# EAGLE board 04A-020-A1-01 (EAGLE 9.6.2)
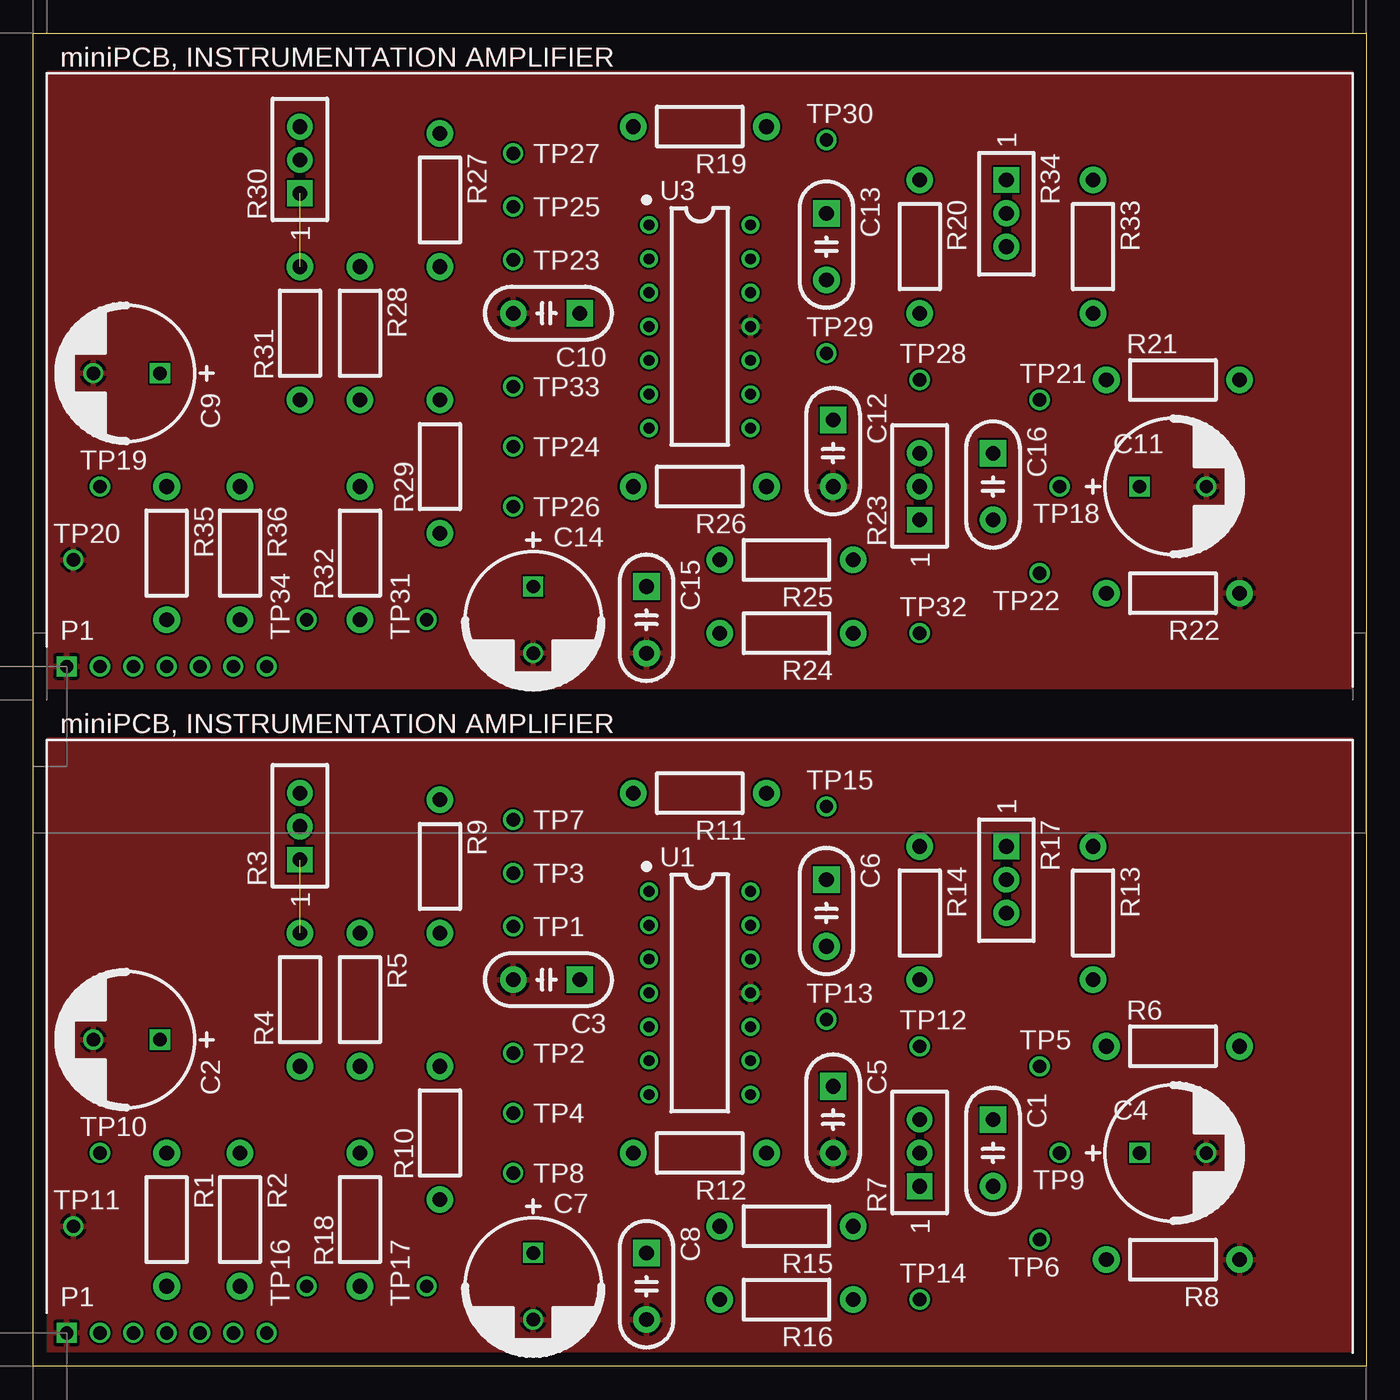
[diagram p0: board, top side]
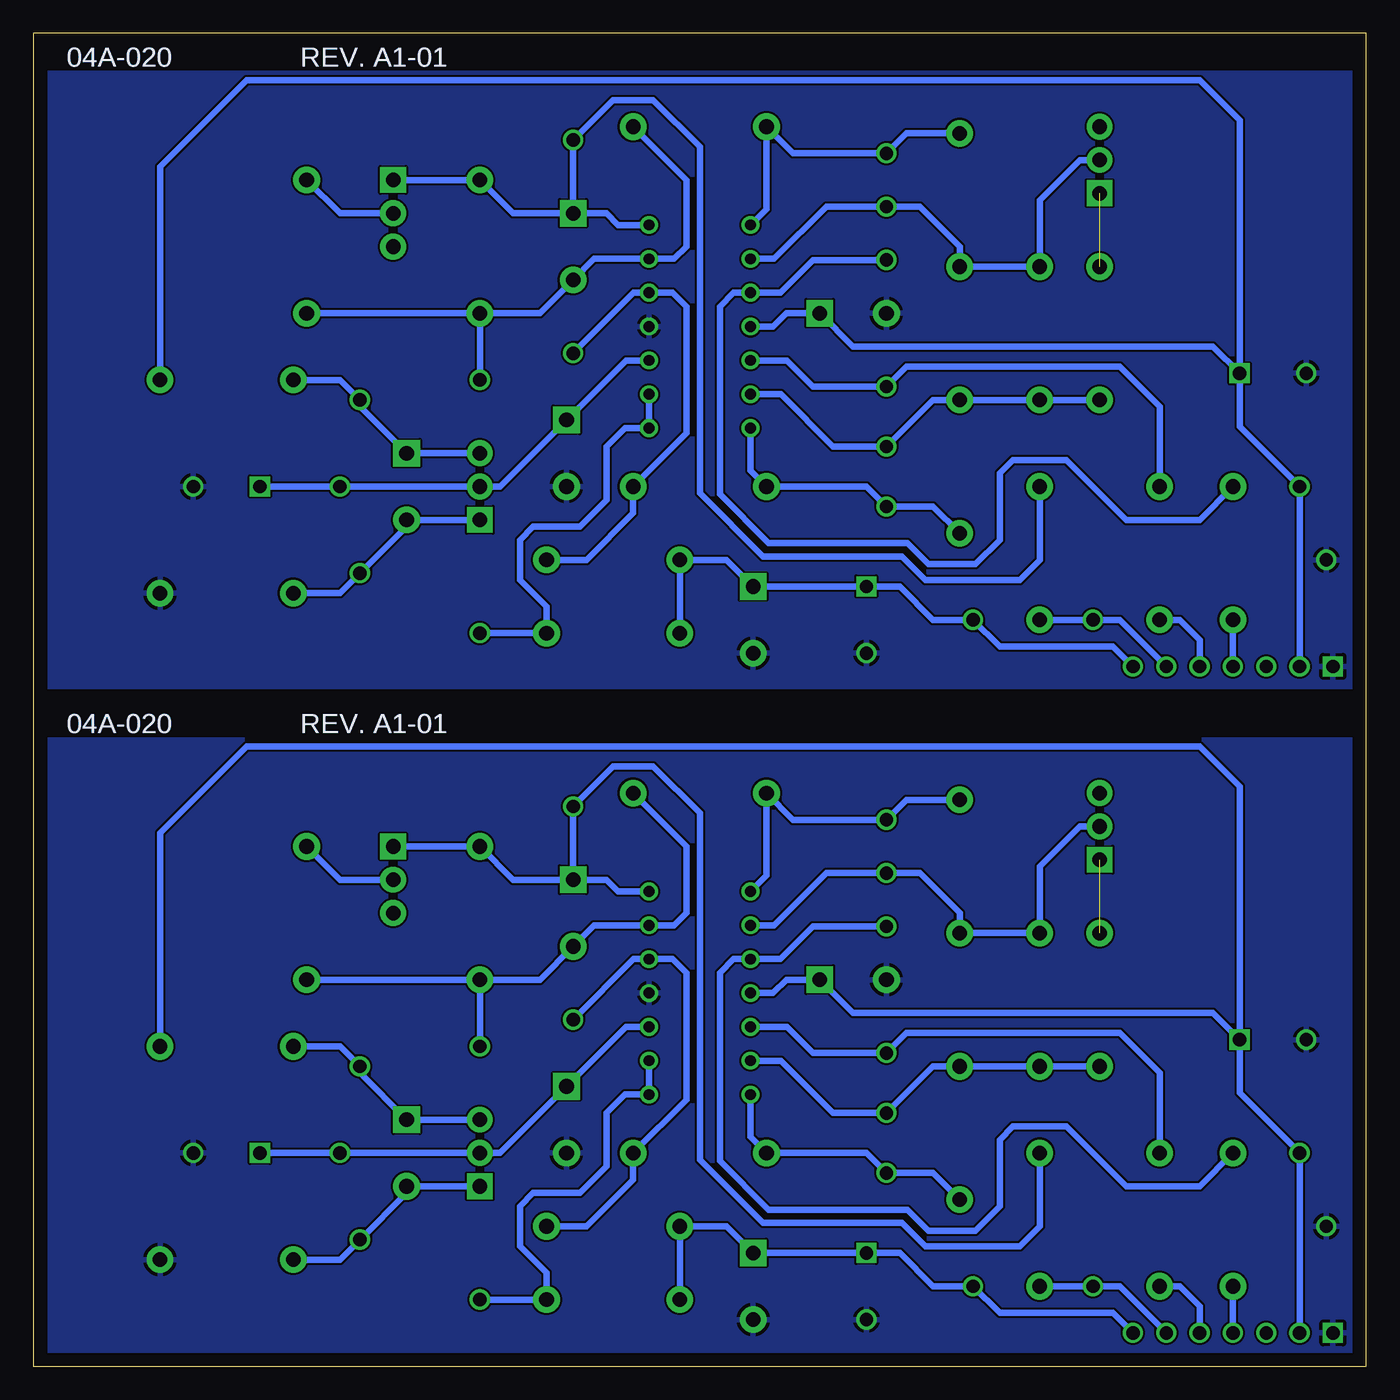
[diagram p1: board, bottom side, seen from below]

Size 100 x 100 mm. Coordinates in mm from the lower left corner, seen from the top.
Outline: 0,0 0,100 100,100 100,0 0,0
Copper layers (1*16): Top 0.035mm / dielectric 0.15mm / Bottom 0.035mm
Design rules "default": minimum track width 6mil, minimum drill 0.35mm, track to track 6mil, track to pad 6mil, pad to pad 6mil, via to via 6mil, smd to smd 6mil, copper to edge 40mil, drill to drill 6mil, minimum pad ring 10mil, minimum via ring 8mil, stop-mask expansion 4mil, vias tented up to drill 0mil, thermal gap 10mil

## Footprints (pad centres in the part's own frame; a part is rotated, then mirrored left to right if it is on the bottom)
C050-024X044 = drill 1.1 pad 2 square: 1 -2.5,0 | drill 1.1 pad 2: 2 2.5,0
C5MM = drill 1 square: + -2.5,0 | drill 1: - 2.5,0
PINS_1X7 = drill 1 square: 1 0,0 | drill 1: 2 2.5,0; 3 5,0; 4 7.5,0; 5 10,0; 6 12.5,0; 7 15,0
0207/10 = drill 1.1 pad 2: 1 -5,0; 2 5,0
TRIM_0100 = drill 1.1 pad 1.93 square: 1 0,0 | drill 1.1 pad 1.93: 2 2.5,0; 3 5,0
PINS_1_TESTPOINT_KE5000_NOTEXT = drill 1: 1 0,0
DIL14 = drill 0.813: 1 -7.62,-3.81; 2 -5.08,-3.81; 3 -2.54,-3.81; 4 0,-3.81; 5 2.54,-3.81; 6 5.08,-3.81; 7 7.62,-3.81; 8 7.62,3.81; 9 5.08,3.81; 10 2.54,3.81; 11 0,3.81; 12 -2.54,3.81; 13 -5.08,3.81; 14 -7.62,3.81

## Placement (x,y rotation side)
C1  [C050-024X044]  72,16 270 top
C2  [C5MM]  7,24.5 180 top
C3  [C050-024X044]  38.5,29 180 top
C4  [C5MM]  85.5,16 0 top
C5  [C050-024X044]  60,18.5 270 top
C6  [C050-024X044]  59.5,34 270 top
C7  [C5MM]  37.5,6 270 top
C8  [C050-024X044]  46,6 270 top
C9  [C5MM]  7,74.5 180 top
C10  [C050-024X044]  38.5,79 180 top
C11  [C5MM]  85.5,66 0 top
C12  [C050-024X044]  60,68.5 270 top
C13  [C050-024X044]  59.5,84 270 top
C14  [C5MM]  37.5,56 270 top
C15  [C050-024X044]  46,56 270 top
C16  [C050-024X044]  72,66 270 top
P1  [PINS_1X7]  2.5,2.5 0 top
P2  [PINS_1X7]  2.5,52.5 0 top
R1  [0207/10]  10,11 270 top
R2  [0207/10]  15.5,11 270 top
R3  [TRIM_0100]  20,38 90 top
R4  [0207/10]  20,27.5 90 top
R5  [0207/10]  24.5,27.5 270 top
R6  [0207/10]  85.5,24 0 top
R7  [TRIM_0100]  66.5,13.5 90 top
R8  [0207/10]  85.5,8 180 top
R9  [0207/10]  30.5,37.5 270 top
R10  [0207/10]  30.5,17.5 90 top
R11  [0207/10]  50,43 180 top
R12  [0207/10]  50,16 180 top
R13  [0207/10]  79.5,34 270 top
R14  [0207/10]  66.5,34 270 top
R15  [0207/10]  56.5,10.5 180 top
R16  [0207/10]  56.5,5 180 top
R17  [TRIM_0100]  73,39 270 top
R18  [0207/10]  24.5,11 90 top
R19  [0207/10]  50,93 180 top
R20  [0207/10]  66.5,84 270 top
R21  [0207/10]  85.5,74 0 top
R22  [0207/10]  85.5,58 180 top
R23  [TRIM_0100]  66.5,63.5 90 top
R24  [0207/10]  56.5,55 180 top
R25  [0207/10]  56.5,60.5 180 top
R26  [0207/10]  50,66 180 top
R27  [0207/10]  30.5,87.5 270 top
R28  [0207/10]  24.5,77.5 270 top
R29  [0207/10]  30.5,67.5 90 top
R30  [TRIM_0100]  20,88 90 top
R31  [0207/10]  20,77.5 90 top
R32  [0207/10]  24.5,61 90 top
R33  [0207/10]  79.5,84 270 top
R34  [TRIM_0100]  73,89 270 top
R35  [0207/10]  10,61 270 top
R36  [0207/10]  15.5,61 270 top
TP1  [PINS_1_TESTPOINT_KE5000_NOTEXT]  36,33 0 top
TP2  [PINS_1_TESTPOINT_KE5000_NOTEXT]  36,23.5 0 top
TP3  [PINS_1_TESTPOINT_KE5000_NOTEXT]  36,37 0 top
TP4  [PINS_1_TESTPOINT_KE5000_NOTEXT]  36,19 270 top
TP5  [PINS_1_TESTPOINT_KE5000_NOTEXT]  75.5,22.5 0 top
TP6  [PINS_1_TESTPOINT_KE5000_NOTEXT]  75.5,9.5 180 top
TP7  [PINS_1_TESTPOINT_KE5000_NOTEXT]  36,41 0 top
TP8  [PINS_1_TESTPOINT_KE5000_NOTEXT]  36,14.5 0 top
TP9  [PINS_1_TESTPOINT_KE5000_NOTEXT]  77,16 0 top
TP10  [PINS_1_TESTPOINT_KE5000_NOTEXT]  5,16 0 top
TP11  [PINS_1_TESTPOINT_KE5000_NOTEXT]  3,10.5 0 top
TP12  [PINS_1_TESTPOINT_KE5000_NOTEXT]  66.5,24 0 top
TP13  [PINS_1_TESTPOINT_KE5000_NOTEXT]  59.5,26 0 top
TP14  [PINS_1_TESTPOINT_KE5000_NOTEXT]  66.5,5 0 top
TP15  [PINS_1_TESTPOINT_KE5000_NOTEXT]  59.5,42 0 top
TP16  [PINS_1_TESTPOINT_KE5000_NOTEXT]  20.5,6 90 top
TP17  [PINS_1_TESTPOINT_KE5000_NOTEXT]  29.5,6 90 top
TP18  [PINS_1_TESTPOINT_KE5000_NOTEXT]  77,66 0 top
TP19  [PINS_1_TESTPOINT_KE5000_NOTEXT]  5,66 0 top
TP20  [PINS_1_TESTPOINT_KE5000_NOTEXT]  3,60.5 0 top
TP21  [PINS_1_TESTPOINT_KE5000_NOTEXT]  75.5,72.5 0 top
TP22  [PINS_1_TESTPOINT_KE5000_NOTEXT]  75.5,59.5 180 top
TP23  [PINS_1_TESTPOINT_KE5000_NOTEXT]  36,83 0 top
TP24  [PINS_1_TESTPOINT_KE5000_NOTEXT]  36,69 270 top
TP25  [PINS_1_TESTPOINT_KE5000_NOTEXT]  36,87 0 top
TP26  [PINS_1_TESTPOINT_KE5000_NOTEXT]  36,64.5 0 top
TP27  [PINS_1_TESTPOINT_KE5000_NOTEXT]  36,91 0 top
TP28  [PINS_1_TESTPOINT_KE5000_NOTEXT]  66.5,74 0 top
TP29  [PINS_1_TESTPOINT_KE5000_NOTEXT]  59.5,76 0 top
TP30  [PINS_1_TESTPOINT_KE5000_NOTEXT]  59.5,92 0 top
TP31  [PINS_1_TESTPOINT_KE5000_NOTEXT]  29.5,56 90 top
TP32  [PINS_1_TESTPOINT_KE5000_NOTEXT]  66.5,55 0 top
TP33  [PINS_1_TESTPOINT_KE5000_NOTEXT]  36,73.5 0 top
TP34  [PINS_1_TESTPOINT_KE5000_NOTEXT]  20.5,56 90 top
U1  [DIL14]  50,28 270 top
U2  CLASSIC-50X100  [PCB50X100]  0,0 0 top
U3  [DIL14]  50,78 270 top
U4  CLASSIC-50X100  [PCB50X100]  0,50 0 top

## Library data of the parts
C1-C16 P1 P2 R1-R36 TP1-TP34 U1 U3 = minipcb
U2 U4 = miniPCB_BOARDS; PART_NUMBER: 04A-020; REVISION: A1-01; TITLE: miniPCB, INSTRUMENTATION AMPLIFIER

## Nets
BIAS: C4.+ C5.1 R7.2 TP9.1 U1.10
BIAS1: C11.+ C12.1 R23.2 TP18.1 U3.10
GND: C2.- C3.2 C4.- C5.2 C7.- C8.2 P1.1 R8.1 TP11.1 U1.11
GND1: C9.- C10.2 C11.- C12.2 C14.- C15.2 P2.1 R22.1 TP20.1 U3.11
N$1: R12.1 R15.1 TP13.1 U1.12
N$2: C7.+ C8.1 P1.7 R15.2 R16.2 TP17.1
N$3: R2.1 TP2.1 U1.5
N$4: R1.1 TP1.1 U1.3
N$5: R3.2 R5.1 R9.2 TP3.1 U1.2
N$6: R4.1 R5.2 R10.2 TP4.1 U1.6
N$7: R9.1 R11.2 TP7.1 U1.1
N$8: R10.1 R12.2 TP8.1 U1.7
N$9: R16.1 TP14.1 U1.8 U1.9
N$10: R3.1 R4.2
N$11: P1.6 R18.1 TP16.1
N$12: R13.1 R17.2
N$13: P1.4 R1.2
N$14: P1.5 R2.2
N$15: R25.1 R26.1 TP29.1 U3.12
N$16: C14.+ C15.1 P2.7 R24.2 R25.2 TP31.1
N$17: R36.1 TP33.1 U3.5
N$18: R35.1 TP23.1 U3.3
N$19: R27.2 R28.1 R30.2 TP25.1 U3.2
N$20: R28.2 R29.2 R31.1 TP24.1 U3.6
N$21: R19.2 R27.1 TP27.1 U3.1
N$22: R26.2 R29.1 TP26.1 U3.7
N$23: R24.1 TP32.1 U3.8 U3.9
N$24: R30.1 R31.2
N$25: P2.6 R32.1 TP34.1
N$26: R33.1 R34.2
N$27: P2.4 R35.2
N$28: P2.5 R36.2
NC: P1.3
NC1: P2.3
OUT: C6.1 R14.1 R17.1 R18.2 TP15.1 U1.14
OUT1: C13.1 R20.1 R32.2 R34.1 TP30.1 U3.14
POT.1: C1.2 R7.1 R8.2 TP6.1
POT.2: C16.1 R21.1 R23.3 TP21.1
POT.3: C1.1 R6.1 R7.3 TP5.1
POT.4: C16.2 R22.2 R23.1 TP22.1
V+: C2.+ C3.1 P1.2 R6.2 TP10.1 U1.4
V+1: C9.+ C10.1 P2.2 R21.2 TP19.1 U3.4
VFB: C6.2 R11.1 R13.2 R14.2 TP12.1 U1.13
VFB1: C13.2 R19.1 R20.2 R33.2 TP28.1 U3.13

## Tracks (layer width: path | path; a pad name or v marks a point on that pad's centre or on a via)
BIAS
  Bottom 0.5: C4.+ TP9.1 R7.2 65,16 C5.1 55.54,25.46 U1.10
BIAS1
  Bottom 0.5: C11.+ TP18.1 R23.2 65,66 C12.1 55.54,75.46 U3.10
GND
  pour Bottom: 1,1 99,1 99,47 1,47
  pour Top: 1,1 99,1 99,47 1,47
GND1
  pour Bottom: 1,51 99,51 99,97 1,97
  pour Top: 1,51 99,51 99,97 1,97
N$1
  Bottom 0.5: TP13.1 54.96,30.54 U1.12 52.04,30.54 51,29.5 51,20 R12.1 55,14 58.5,10.5 R15.1
N$2
  Bottom 0.5: R16.2 R15.2 48,10.5 C8.1 C7.+ 35,8.5 32.5,6 TP17.1 27.5,4 19,4 P1.7
N$3
  Bottom 0.5: U1.5 43.46,25.46 41.5,23.5 TP2.1 34.5,25 18.5,25 15.5,22 R2.1
N$4
  Bottom 0.5: TP1.1 41.5,33 43.96,30.54 U1.3 47.46,30.54 48.5,29.5 48.5,15.41 44.84,11.75 34.42,11.75 32.84,10.16 29.34,10.16 27.5,12 27.5,17 26.5,18 22.5,18 18,13.5 12.5,13.5 R1.1
N$5
  Bottom 0.5: R3.2 21.5,40.5 24.5,37.5 R5.1 R9.2 30.5,34 33.5,37 TP3.1 40.5,37 44.42,33.08 U1.2
N$6
  Bottom 0.5: R4.1 R5.2 R10.2 32.5,22.5 TP4.1 40,19 43.92,22.92 U1.6
N$7
  Bottom 0.5: U1.1 45,36.81 R11.2 43,41 TP7.1 34.5,42.5 R9.1
N$8
  Bottom 0.5: R10.1 32.5,14.5 TP8.1 37.5,16 R12.2 46.19,17.19 U1.7
N$9
  Bottom 0.5: U1.9 U1.8 55.62,20.38 57,19 57,15 59,13 62.5,13 63.5,12 63.5,9 61.5,7 R16.1 TP14.1
N$10  (1 unrouted)
N$11
  Bottom 0.5: P1.6 18.5,6 TP16.1 R18.1
N$12
  Bottom 0.5: R13.1 77,36.5 R17.2
N$13
  Bottom 0.5: P1.4 R1.2
N$14
  Bottom 0.5: P1.5 12.5,4.5 14,6 R2.2
N$15
  Bottom 0.5: TP29.1 54.96,80.54 U3.12 52.04,80.54 51,79.5 51,70 R26.1 55,64 58.5,60.5 R25.1
N$16
  Bottom 0.5: R24.2 R25.2 48,60.5 C15.1 C14.+ 35,58.5 32.5,56 TP31.1 27.5,54 19,54 P2.7
N$17
  Bottom 0.5: U3.5 43.46,75.46 41.5,73.5 TP33.1 34.5,75 18.5,75 15.5,72 R36.1
N$18
  Bottom 0.5: TP23.1 41.5,83 43.96,80.54 U3.3 47.46,80.54 48.5,79.5 48.5,65.41 44.84,61.75 34.42,61.75 32.84,60.16 29.34,60.16 27.5,62 27.5,67 26.5,68 22.5,68 18,63.5 12.5,63.5 R35.1
N$19
  Bottom 0.5: R30.2 21.5,90.5 24.5,87.5 R28.1 R27.2 30.5,84 33.5,87 TP25.1 40.5,87 44.42,83.08 U3.2
N$20
  Bottom 0.5: R31.1 R28.2 R29.2 32.5,72.5 TP24.1 40,69 43.92,72.92 U3.6
N$21
  Bottom 0.5: U3.1 45,86.81 R19.2 43,91 TP27.1 34.5,92.5 R27.1
N$22
  Bottom 0.5: R29.1 32.5,64.5 TP26.1 37.5,66 R26.2 46.19,67.19 U3.7
N$23
  Bottom 0.5: U3.9 U3.8 55.62,70.38 57,69 57,65 59,63 62.5,63 63.5,62 63.5,59 61.5,57 R24.1 TP32.1
N$24  (1 unrouted)
N$25
  Bottom 0.5: P2.6 18.5,56 TP34.1 R32.1
N$26
  Bottom 0.5: R33.1 77,86.5 R34.2
N$27
  Bottom 0.5: P2.4 R35.2
N$28
  Bottom 0.5: P2.5 12.5,54.5 14,56 R36.2
OUT
  Bottom 0.5: R17.1 R14.1 64,36.5 C6.1 | C6.1 57,36.5 56.12,35.62 U1.14 | C6.1 TP15.1 56.5,45 53.5,45 50,41.5 50,15.5 45.25,10.75 34.84,10.75 33.09,9 26,9 24.5,10.5 R18.2
OUT1
  Bottom 0.5: R34.1 R20.1 64,86.5 C13.1 | C13.1 57,86.5 56.12,85.62 U3.14 | C13.1 TP30.1 56.5,95 53.5,95 50,91.5 50,65.5 45.25,60.75 34.84,60.75 33.09,59 26,59 24.5,60.5 R32.2
POT.1
  Bottom 0.5: R8.2 77,8 TP6.1 72,13 C1.2 R7.1
POT.2
  Bottom 0.5: R21.1 77,74 TP21.1 75.5,72 C16.1 R23.3
POT.3
  Bottom 0.5: R6.1 77,24 TP5.1 75.5,22 C1.1 R7.3
POT.4
  Bottom 0.5: R22.2 77,58 TP22.1 72,63 C16.2 R23.1
V+
  Bottom 0.5: R6.2 90.5,40 84,46.5 12.5,46.5 9.5,43.5 C2.+ | P1.2 TP10.1 9.5,20.5 C2.+ | U1.4 44.5,28 43.5,29 C3.1 38.5,26.5 11.5,26.5 C2.+
V+1
  Bottom 0.5: R21.2 90.5,90 84,96.5 12.5,96.5 9.5,93.5 C9.+ | P2.2 TP19.1 9.5,70.5 C9.+ | U3.4 44.5,78 43.5,79 C10.1 38.5,76.5 11.5,76.5 C9.+
VFB
  Bottom 0.5: TP12.1 R14.2 | R13.2 R14.2 | R11.1 51,39 51,34 51.92,33.08 U1.13 57.92,33.08 C6.2 62,29 R14.2
VFB1
  Bottom 0.5: TP28.1 R20.2 | R33.2 R20.2 | R19.1 51,89 51,84 51.92,83.08 U3.13 57.92,83.08 C13.2 62,79 R20.2